# Altium PCB APM32F030K8T6核心板PCB.PcbDoc
Units mil, origin at the board's own origin, x right, y up, seen from the top; angles counter-clockwise.
Board outline 1700 x 900 mil, 2 copper layers (Top Layer, Bottom Layer); 26 components, 34 nets, 127 pads, 29 vias.
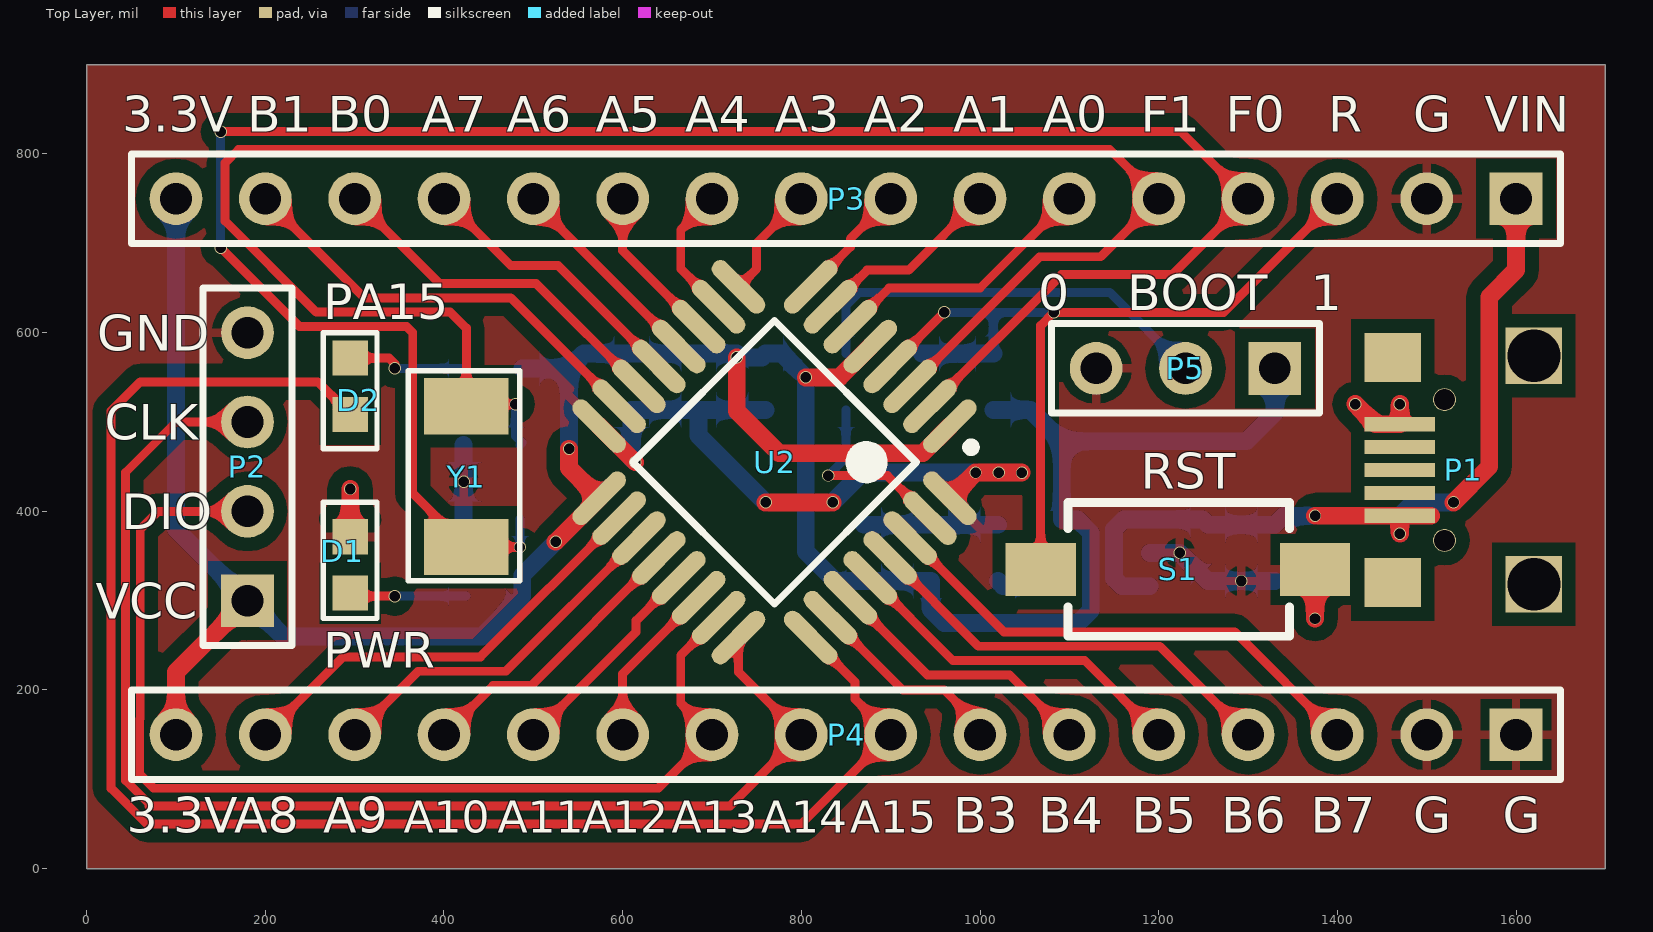
[diagram p0: Top Layer view]
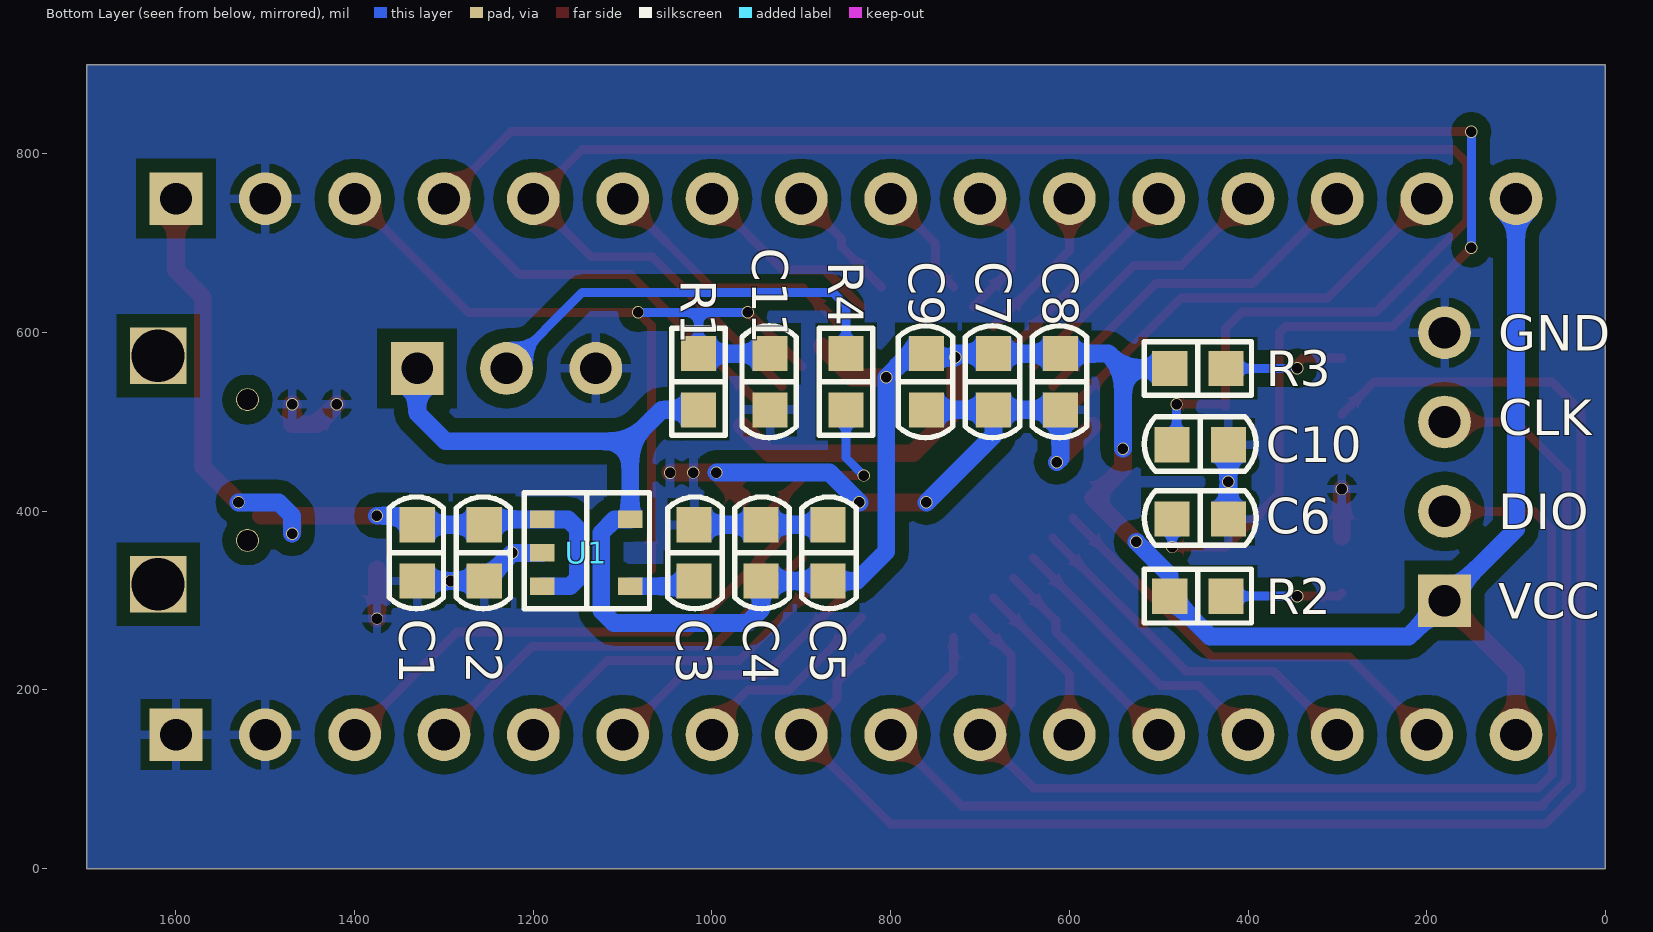
[diagram p1: Bottom Layer view, seen from below]
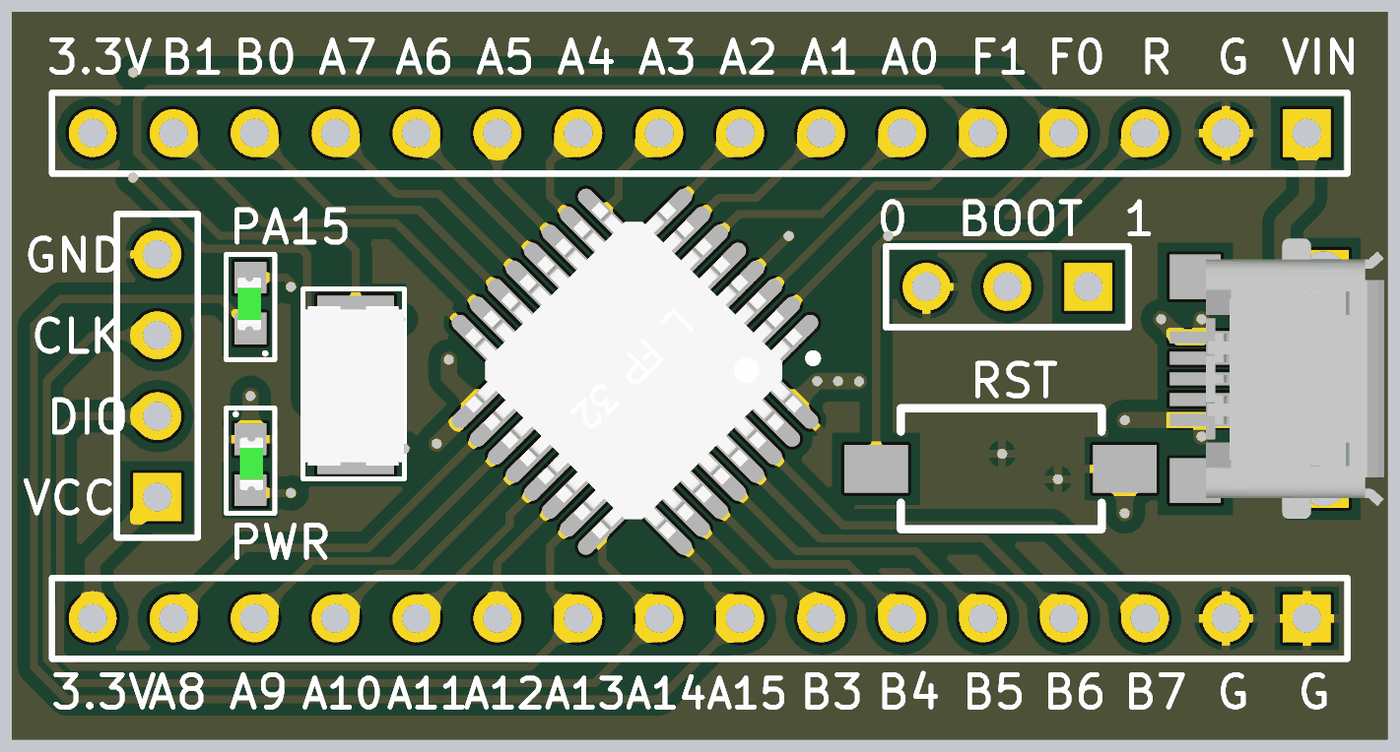
[diagram p2: 3D render of the assembled board from above, using the file's embedded part models]
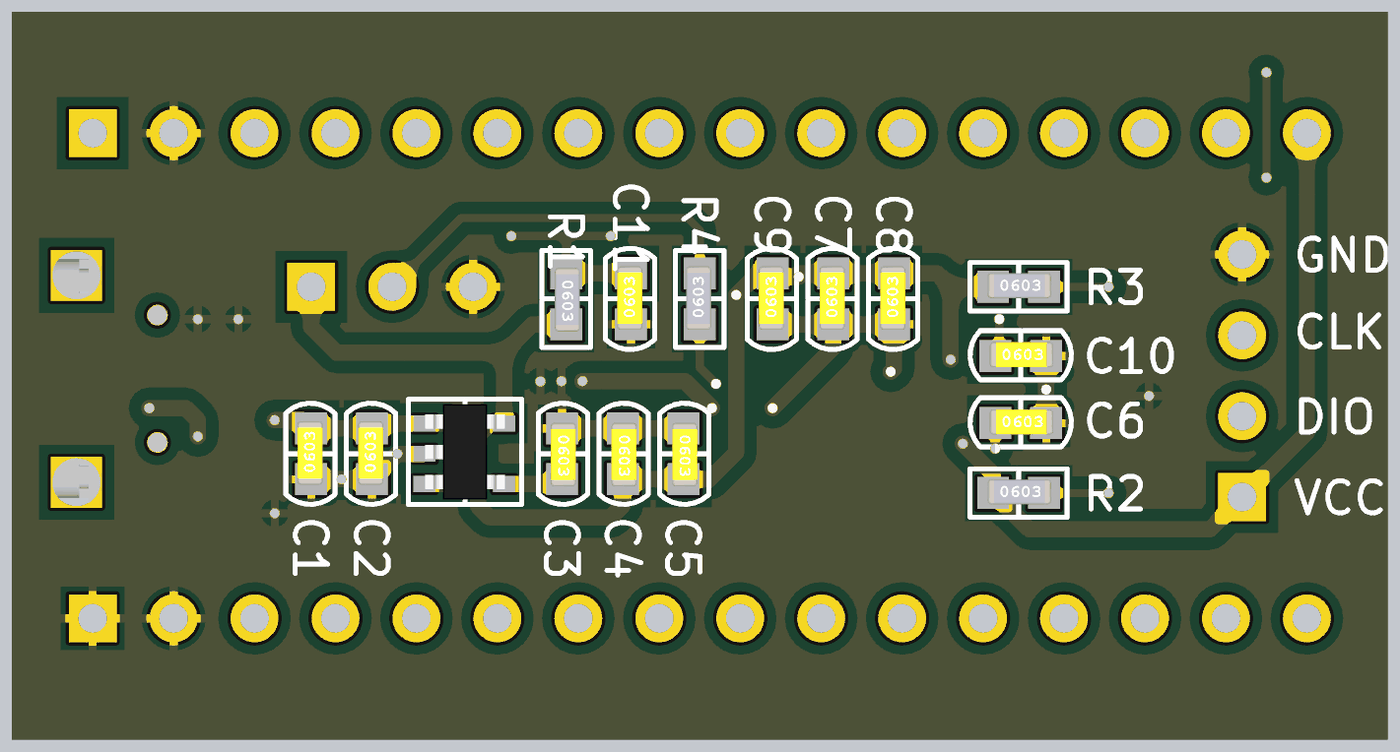
[diagram p3: 3D render of the assembled board from below, using the file's embedded part models]

## Layer stack, top to bottom
Top Solder: solder mask 0.4, Solder Resist, Dk 3.5
Top Layer: signal copper 1.4
Dielectric 1: dielectric 12.6, FR-4, Dk 4.8
Bottom Layer: signal copper 1.4
Bottom Solder: solder mask 0.4, Solder Resist, Dk 3.5

## Board outline
0,0 1700,0 1700,900 0,900

## Design rules (kind name [scope] priority, off if disabled: settings)
Clearance [All] p1: gap=6
PolygonConnect [All] p1: connectstyle=Relief reliefconductorwidth=10 reliefentries=4 polygonreliefangle="90 Angle" airgapwidth=10
RoutingVias [All] p1: holewidth=28 width=50 viastyle="Through Hole" minholewidth=28 minwidth=50 maxholewidth=28 maxwidth=50
SolderMaskExpansion [All] p1: expansion=4
Width [All] p1: maxlimit=30 minlimit=6 preferedwidth=10
30 further rules are at their usual default settings.

## Components (designator, comment, footprint, x,y, rotation, side; value= is the part's Value field where it differs from the comment)
C1 "Cap 0603" R0603-R/C-Y 1330,353.5 r90 bottom
C2 "Cap 0603" R0603-R/C-Y 1255,353.5 r90 bottom
C3 "Cap 0603" R0603-R/C-Y 1020,353.5 r270 bottom
C4 "Cap 0603" R0603-R/C-Y 945,353.5 r270 bottom
C5 "Cap 0603" R0603-R/C-Y 870,353.5 r270 bottom
C6 "Cap 0603" R0603-R/C-Y 453.5,391.43 r180 bottom
C7 "Cap 0603" R0603-R/C-Y 685,545 r90 bottom
C8 "Cap 0603" R0603-R/C-Y 610,545 r90 bottom
C9 "Cap 0603" R0603-R/C-Y 760,545 r90 bottom
C10 "Cap 0603" R0603-R/C-Y 453.5,474.43 r180 bottom
C11 "Cap 0603" R0603-R/C-Y 935,545 r90 bottom
D1 "LED 0603" 0603-LED-G 295,340 r90 top
D2 "LED 0603" 0603-LED-G 295,540 r270 top
P1 "USB-Micro" "USB Micro" 1470,446.26 r270 top
P2 "Header 4" HDR1X4 180,300 r90 top
P3 "Header 16" HDR1X16 1600,750 r180 top
P4 "Header 16" HDR1X16 1600,150 r180 top
P5 "Header 3" HDR1X3 1330,560 r180 top
R1 "Res 0603" R0603-R/C-BY 1015,545 r270 bottom
R2 "Res 0603" R0603-R/C-BY 456.11,305 r180 bottom
R3 "Res 0603" R0603-R/C-BY 456.11,560 r180 bottom
R4 "Res 0603" R0603-R/C-BY 850,545 r90 bottom
S1 "SW_PB" SW-2Pin 1375,335 r180 top
U1 "ME6211C33M5G SOT-23-5" SOT-23-5 1190,390.9 r270 bottom
U2 "STM32F030K6T6 LQFP32" QFP32_M 770,455 r225 top
Y1 "XTAL" XTAL_5032 425,517.48 r270 top

## Footprints (in the part's own frame and the unit in brackets; to place one, negate y for a bottom-side part, rotate by r counter-clockwise, add the part's x,y. Pads: shape width x height; smd on the part's side, far side on the other; paste and mask are expansions set on the pad)
0603-LED-G [mm]
  rect 1x1 smd: 1(-0.8,0) 2(0.8,0)
  round 0.2 on Top Overlay mask+0: 2(1.587,0.463)
  silkscreen extent -1.52,-0.76 1.78,0.76, body extent -0.8,-0.39 0.85,0.33, height 0.68
HDR1X3 [mm] "Connector; Header; 3 Position"
  rect 1.5x1.5 hole 0.9: 1(0,0)
  round 1.5 hole 0.9: 2(2.54,0) 3(5.08,0)
  silkscreen extent -1.27,-1.27 6.35,1.27
HDR1X4 [mm] "Connector; Header; 4 Position"
  rect 1.5x1.5 hole 0.9: 1(0,0)
  round 1.5 hole 0.9: 2(2.54,0) 3(5.08,0) 4(7.62,0)
  silkscreen extent -1.27,-1.27 8.89,1.27
HDR1X16 [mm] "Connector; Header; 16 Position"
  rect 1.5x1.5 hole 0.9: 1(0,0)
  round 1.5 hole 0.9: 2(2.54,0) 3(5.08,0) 4(7.62,0) 5(10.16,0) 6(12.7,0) 7(15.24,0) 8(17.78,0) 9(20.32,0) 10(22.86,0) 11(25.4,0) 12(27.94,0) 13(30.48,0) 14(33.02,0) 15(35.56,0) 16(38.1,0)
  silkscreen extent -1.27,-1.27 39.37,1.27
QFP32_M [mm] "32-Pin Quad Flat Pack 0.8 mm Pitch, IPC Low Density"
  oval 1.95x0.5 smd: 1(-4.25,2.8) 2(-4.25,2) 3(-4.25,1.2) 4(-4.25,0.4) 5(-4.25,-0.4) 6(-4.25,-1.2) 7(-4.25,-2) 8(-4.25,-2.8) 17(4.25,-2.8) 18(4.25,-2) 19(4.25,-1.2) 20(4.25,-0.4) 21(4.25,0.4) 22(4.25,1.2) 23(4.25,2) 24(4.25,2.8)
  oval 0.5x1.95 smd: 9(-2.8,-4.25) 10(-2,-4.25) 11(-1.2,-4.25) 12(-0.4,-4.25) 13(0.4,-4.25) 14(1.2,-4.25) 15(2,-4.25) 16(2.8,-4.25) 25(2.8,4.25) 26(2,4.25) 27(1.2,4.25) 28(0.4,4.25) 29(-0.4,4.25) 30(-1.2,4.25) 31(-2,4.25) 32(-2.8,4.25)
  silkscreen extent -4.37,-2.85 2.85,3.77, body extent -4.5,-4.55 4.5,4.45, height 1.63
R0603-R/C-BY [mm]
  rect 1x1 smd: 1(-0.8,0) 2(0.8,0)
  silkscreen extent -1.52,-0.76 1.52,0.76, body extent -0.97,-0.36 1.03,0.43, height 0.79
R0603-R/C-Y [mm]
  rect 1x1 smd: 1(-0.8,0) 2(0.8,0)
  silkscreen extent -1.59,-0.75 1.59,0.8, body extent -0.97,-0.36 1.03,0.43, height 0.79
SOT-23-5 [mm]
  rect 0.5x0.7 smd: 1(0,0) 2(0.95,0) 3(1.9,0) 4(1.9,2.5) 5(0,2.5)
  silkscreen extent -0.76,-0.51 2.54,3.05, body extent -0.61,0.02 2.39,2.52, height 1.05
SW-2Pin [mm]
  rect 2x1.5 smd: 1(0,0) 2(7.8,0)
  silkscreen extent 0.73,-1.9 7.03,1.9, body extent -0.06,-1.94 7.83,1.91, height 2.5
"USB Micro" [mm]
  rect 0.4x2 smd: 1(-1.3,0) 2(-0.65,0) 3(0,0) 4(0.65,0) 5(1.3,0)
  rect 1.6x1.6 hole 1.5: ""(-3.25,3.81) ""(3.25,3.81)
  rect 1.4x1.6 smd: ""(-3.2,-0.2) ""(3.2,-0.2)
  round 0.65 hole 0.6 unplated: ""(-2,1.27) ""(2,1.27)
  body extent -4.4,0.13 4.4,5.73, height 2.83
XTAL_5032 [mm]
  rect 1.6x2.4 smd: 1(0,0) 2(4,0)
  silkscreen extent -1.02,-1.65 4.95,1.52, body extent -0.47,-1.68 4.53,1.52, height 1.3

## Part data
C1 C2 C3 C4 C5 C6 C7 C8 C9 C10 C11: "Capacitor 0603"
P2: "Header, 4-Pin"
P3 P4: "Header, 16-Pin"
P5: "Header, 3-Pin"
R1 R2 R3 R4: "Resistor 0603"
U1: library part ME6211C33M5G
Y1: library part "XTAL 8MHZ", "XTAL 8MHZ"

## Via types
v1: diameter 13.78, hole 11.81, Top Layer to Bottom Layer, tented both sides, 29 vias

## Nets (pads, with @x,y where several pads share a name; then routed paths per layer and width w, separated by ;. In a path a pad name is that pad's centre, name@x,y a point inside that pad or via, vN(x,y) a via of type N, cw(c..) or ccw(c..) an arc to the next point about the centre after c; other vN are vias at no path point)
BOOT0: R4.1 U2.31 | length 215.5
  Top Layer w10: v1(830,440) 896.36,440 U2.31
  Bottom Layer w10: v1(830,440) 850,460 R4.1
GND: C1.1 C2.1 C3.1 C4.1 C5.1 C6.2 C7.1 C8.1 C9.1 C10.2 C11.1 D1.2@295,371.5 P1.1 P2.4 P3.2 P4.1 P4.2 P5.3 S1.1 U1.2 U2.16 U2.32 | length 1321
  Top Layer w20: D1.2@295,371.5 v1(295,425) ; U2.16 v1(614.1,455) ; v1(760,410) v1(835,410) ; U2.32@966.26,416.26 U2.32 v1(995,443.37) v1(1020.82,443.37) v1@1046.63,443.37 ; v1(1375,280) S1.1 ; v1(1420,520) 1442.56,497.44 P1.1 v1(1470,520)
  Bottom Layer w20: C6.2 v1(422.01,432.93) C10.2 ; v1(614.1,455) 610,459.1 C8.1 C7.1 ; v1(760,410) 685,485 C7.1 ; C9.1 C7.1 ; v1(835,410) 868.37,443.37 v1(995,443.37) ; C5.1 C4.1 C3.1 ; U1.2 v1(1223.51,353.5) C2.1 v1(1292.5,322.01) C1.1
  other v1: 1046.91,443.09
NetC3_2: C3.2 U1.4 | length 74
  Bottom Layer w20: C3.2 1025.91,316.09 U1.4
NetD1_1: D1.1 R2.2 | length 131.1
  Top Layer w10: D1.1 298.5,305 v1(345,305)
  Bottom Layer w10: v1(345,305) R2.2
NetD2_1: D2.1 R3.2 | length 137.3
  Top Layer w10: D2.1 338.5,571.5 345,565 v1(345,560)
  Bottom Layer w10: v1(345,560) R3.2
NetP5_2: P5.2 R4.2 | length 474.9
  Bottom Layer w10: R4.2 850,630 865,645 1145,645 P5.2
OSC_IN: C6.1 P3.4 U2.2 Y1.2 | length 2374
  Top Layer w10: v1(150,695) 238,607 358,607 365,600 365,420 Y1.2 v1(485,360) ; v1(150,825) 1225,825 P3.4 1215,665 1091.36,665 U2.2
  Bottom Layer w10: v1(150,695) v1(150,825) ; v1(485,360) C6.1
OSC_OUT: C10.1 P3.5 U2.3 Y1.1 | length 2017.3
  Top Layer w10: v1(480,520) 427.52,520 Y1.1 425,605 407,623 257,623 155,725 155,790 170,805 1145,805 P3.5 1135,685 1066.81,685 U2.3
  Bottom Layer w10: v1(480,520) 480,484.47 487.52,476.95 C10.1
PA0: P3.6 U2.6 | length 304.4
  Top Layer w10: U2.6 898.19,650 1000,650 P3.6
PA1: P3.7 U2.7 | length 217.5
  Top Layer w10: U2.7 873.64,670 920,670 P3.7
PA2: P3.8 U2.8 | length 135.9
  Top Layer w10: U2.8 855,695.9 855,705 P3.8
PA3: P3.9 U2.9 | length 127.9
  Top Layer w10: U2.9 750,671.63 750,700 P3.9
PA4: P3.10 U2.10 | length 153.1
  Top Layer w10: P3.10 665,715 665,671.36 U2.10
PA5: P3.11 U2.11 | length 178.5
  Top Layer w10: P3.11 600,691.81 U2.11
PA6: P3.12 U2.12 | length 233
  Top Layer w10: P3.12 500,747.27 U2.12
PA7: P3.13 U2.13 | length 318.3
  Top Layer w10: P3.13 475,675 527.73,675 U2.13
PA8: P4.15 U2.18 | length 496.4
  Top Layer w10: P4.15 287,237 440.64,237 U2.18
PA9: P4.14 U2.19 | length 409.4
  Top Layer w10: P4.14 371,221 469.19,221 U2.19
PA10: P4.13 U2.20 | length 322.5
  Top Layer w10: P4.13 455,205 497.73,205 U2.20
PA11: P4.12 U2.21 | length 243
  Top Layer w10: P4.12 615,265 615,277.73 U2.21
PA12: P4.11 U2.22 | length 188.5
  Top Layer w10: P4.11 600,218.19 U2.22
PA13: P2.2 P4.10 U2.23 | length 1237.8
  Top Layer w10: P2.2 80,400 60,380 60,167.84 59.47,167.31 59.47,105.53 75,90 640,90 P4.10 665,185 665,238.64 U2.23
PA14: P2.3 P4.9 U2.24 | length 1445.4
  Top Layer w10: P2.3 100,500 43.47,443.47 43.47,98.9 70,72.37 70,70 720,70 P4.9 729.63,220.37 U2.24
PA15: D2.2@295,508.5 P4.8 U2.25 | length 1795
  Top Layer w10: D2.2@295,508.5 258.5,545 60,545 27.47,512.47 27.47,89.9 67.37,50 800,50 P4.8 860,190 860,209.1 U2.25
PB0: P3.14 U2.14 | length 405.3
  Top Layer w10: P3.14 395,655 503.19,655 U2.14
PB1: P3.15 U2.15 | length 492.3
  Top Layer w10: P3.15 311,639 474.64,639 U2.15
PB3: P4.7 U2.26 | length 227.5
  Top Layer w10: U2.26 913.64,200 960,200 1000,160 P4.7
PB4: P4.6 U2.27 | length 308.6
  Top Layer w10: U2.27 941.19,217 1033,217 P4.6
PB5: P4.5 U2.28 | length 395.5
  Top Layer w10: U2.28 969.73,233 1117,233 P4.5
PB6: P4.4 U2.29 | length 482.5
  Top Layer w10: U2.29 998.27,249 1201,249 P4.4
PB7: P4.3 U2.30 | length 569.4
  Top Layer w10: U2.30 1026.81,265 1285,265 P4.3
RST: C11.2 P3.3 R1.1 S1.2 U2.4 | length 998.4
  Top Layer w10: U2.4 v1(960,622.73) ; S1.2 1067.91,607.91 v1(1082.73,622.73) 1272.73,622.73 P3.3
  Bottom Layer w10: v1(960,622.73) 1015,622.73 ; R1.1 1015,622.73 ; v1(1082.73,622.73) 1015,622.73
  Bottom Layer w20: C11.2 R1.1
VCC_3V3: C4.2 C5.2 C7.2 C8.2 C9.2 P2.1 P3.16 P4.16 P5.1 R1.2 R2.1 R3.1 U1.5 U2.1 U2.5 U2.17 | length 3245.3
  Top Layer w20: P4.16 100,220 P2.1 ; v1(525,365.9) U2.17 540,448.37 v1(540,470) ; v1(727.64,572.36) 727.64,512.36 775,465 935.9,465 U2.1 ; v1(805,550) 842.73,550 U2.5
  Bottom Layer w20: P3.16 100,380 P2.1 220,260 442.61,260 R2.1 487.61,328.5 v1(525,365.9) ; R3.1 540,560 ; v1(540,470) 540,560 ; v1(727.64,572.36) 755.86,572.36 C9.2 778.5,576.5 v1(805,550) 805,355 837.99,322.01 C5.2 C4.2 945,290 960,275 1110,275 1124,289 1124,376 1109.1,390.9 U1.5 1091.57,478.43 ; v1@727.64,576.5 C7.2 C8.2 556.5,576.5 540,560 ; R1.2 1056.5,513.5 1091.57,478.43 ; P5.1 1330,510 1298.43,478.43 1091.57,478.43
VCC_5V: C1.2 C2.2 P1.5 P3.1 U1.1 U1.3 | length 940
  Top Layer w20: v1(1375.08,395.08) P1.5 ; v1(1470,375) P1.5 ; P1.5@1504.92,395.08 P1.5 ; v1(1530,410) 1570,450 1570,640 1600,670 P3.1
  Bottom Layer w20: U1.3 1158.91,316.09 1150,325 1150,380 1160.9,390.9 U1.1 1249.1,390.9 C2.2 C1.2 1340.08,395.08 v1(1375.08,395.08) ; v1(1470,375) 1470,395 1485,410 v1(1530,410)
pads on no net: D1.2@276.77,402.47 D2.2@313.23,477.53 P1. P1.2 P1.3 P1.4

## Polygon pours and split planes (outlines as drawn)
GND on Bottom Layer "Top Layer-GND" (solid, remove dead copper, pour order 6): 0,900 1700,900 1700,0 0,0
GND on Top Layer "Top Layer-GND" (solid, remove dead copper, pour order 8): 0,0 0,900 1700,900 1700,0

## Silkscreen, mask and mechanical layers (free items; w line width, h text height)
Top Overlay:
  text "3.3V" at 40,825 h40
  text "B1" at 180,825 h40
  text "B0" at 270,825 h40
  text "A7" at 375,825 h40
  text "A6" at 470,825 h40
  text "A5" at 570,825 h40
  text "A4" at 670,825 h40
  text "A3" at 770,825 h40
  text "A2" at 870,825 h40
  text "A1" at 970,825 h40
  text "A0" at 1070,825 h40
  text "F1" at 1180,825 h40
  text "F0" at 1275,825 h40
  text "R" at 1390,825 h40
  text "G" at 1485,825 h40
  text "VIN" at 1565,825 h40
  text "0" at 1065,625 h40
  text "BOOT" at 1165,625 h40
  text "1" at 1370,625 h40
  text "PA15" at 265,615 h40
  text "GND" at 11.9,580 h40
  text "CLK" at 20.28,480 h40
  text "RST" at 1180,425 h40
  text "DIO" at 39.52,380 h40
  text "VCC" at 10,280 h40
  text "PWR" at 265,225 h40
  text "3.3V" at 45,40 h40
  text "A8" at 165,40 h40
  text "A9" at 265,40 h40
  text "A10" at 355,40 h36
  text "A11" at 460,40 h36
  text "A12" at 555,40 h36
  text "A13" at 655,40 h36
  text "A14" at 755,40 h36
  text "A15" at 855,40 h36
  text "B3" at 970,40 h40
  text "B4" at 1065,40 h40
  text "B5" at 1170,40 h40
  text "B6" at 1270,40 h40
  text "B7" at 1370,40 h40
  text "G" at 1485,40 h40
  text "G" at 1585,40 h40
Bottom Overlay:
  text "GND" at 120,580 h40
  text "CLK" at 120,485 h40
  text "DIO" at 120,380 h40
  text "VCC" at 120,280 h40
Mechanical 1:
  the board outline again, w6